# Altium PCB 3ER_PCB.PcbDoc (part 2 of 2)
Units mil, origin at the board's own origin, x right, y up, seen from the top; angles counter-clockwise.
Board outline 3500 x 3505 mil, 2 copper layers (Top Layer, Bottom Layer); 87 components, 62 nets, 335 pads, 137 vias.
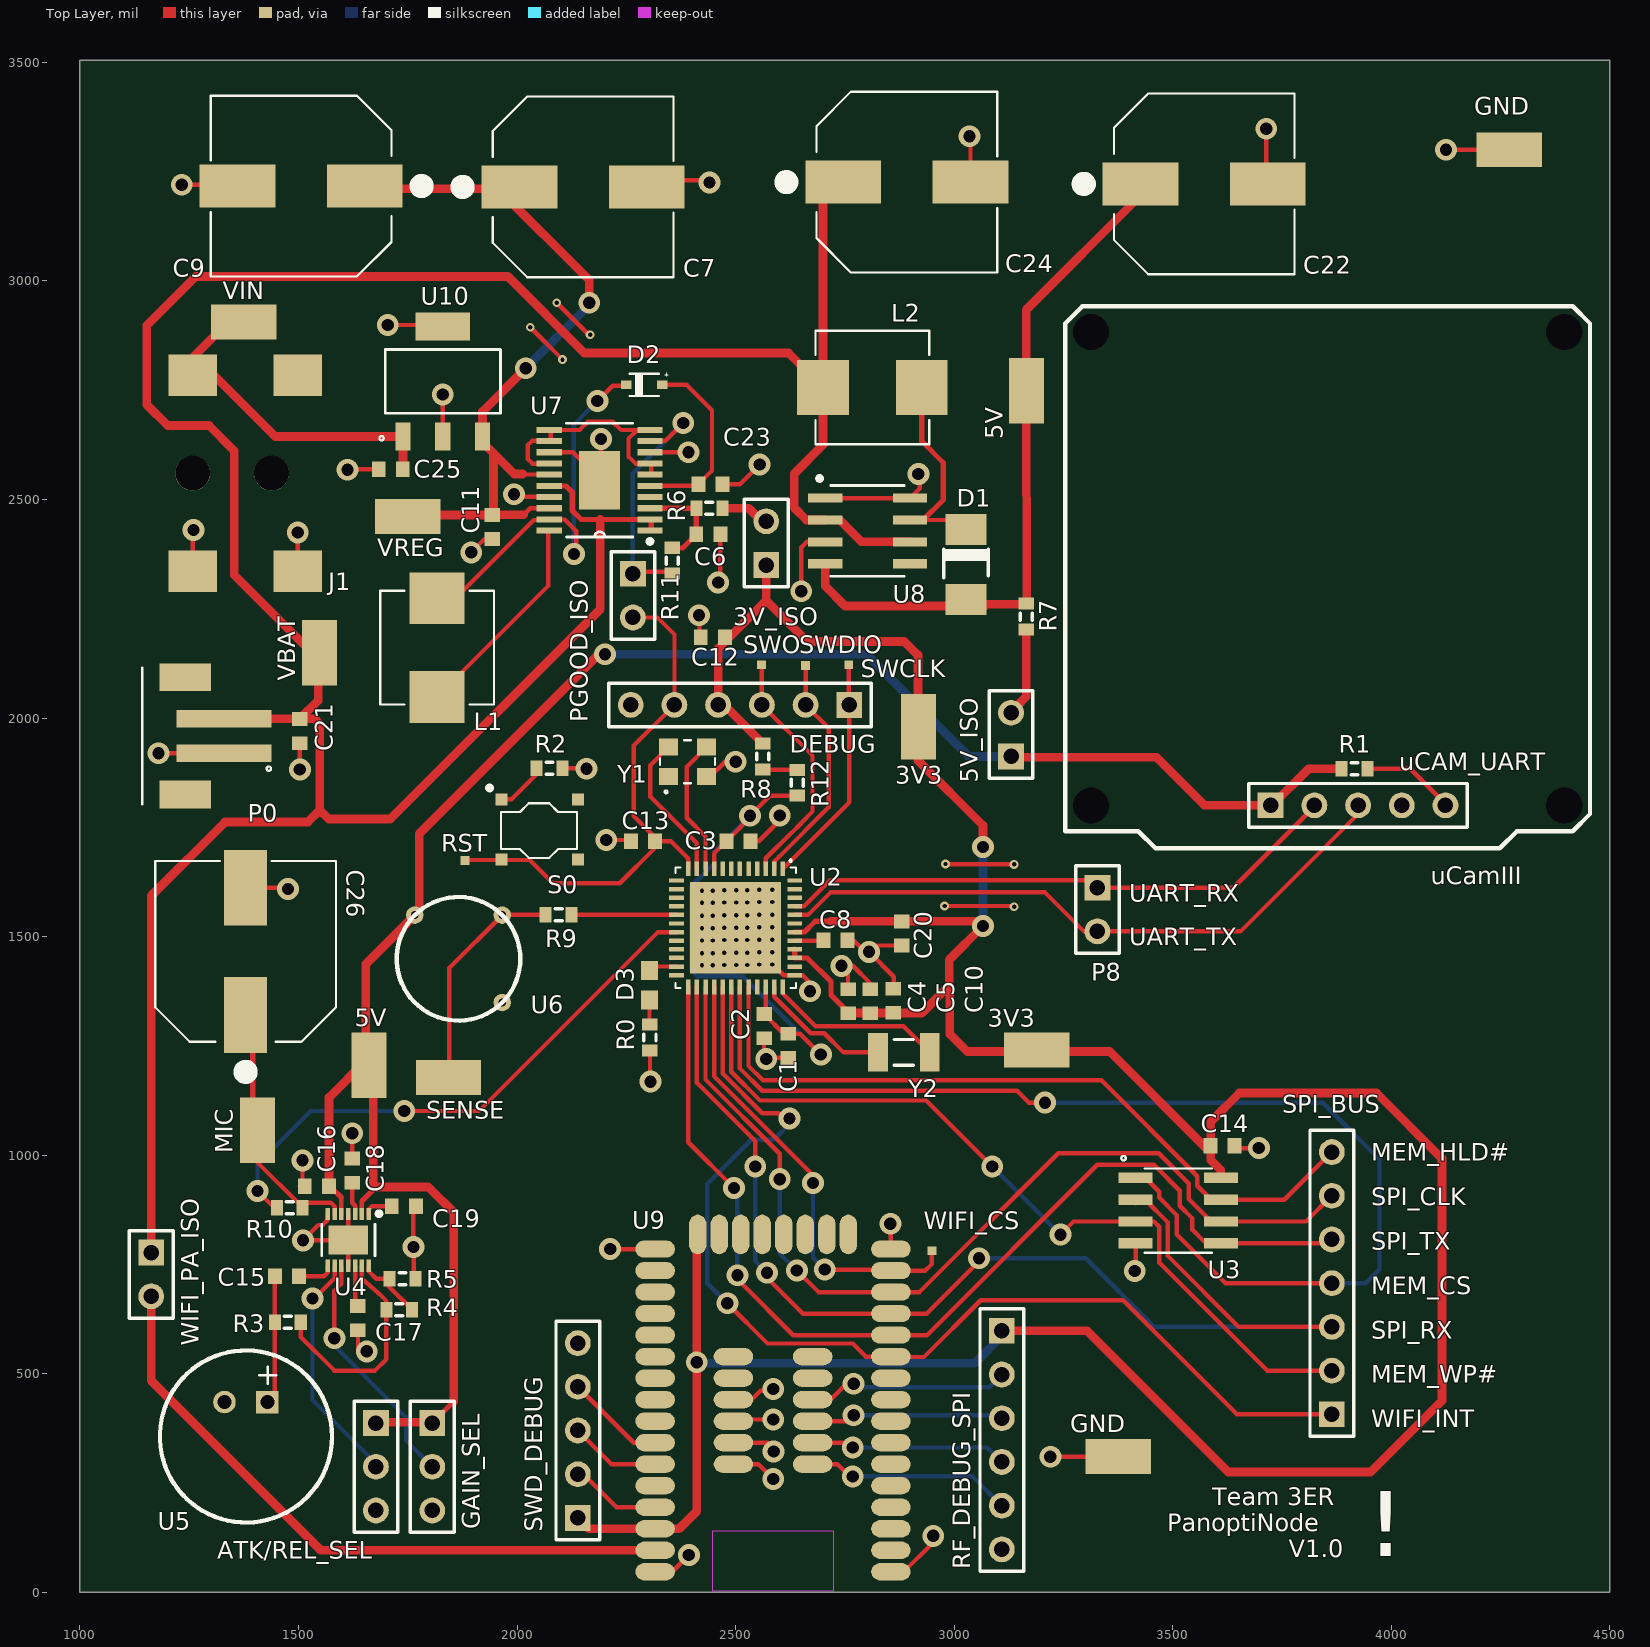
[diagram p0: Top Layer view]

## Silkscreen, mask and mechanical layers (free items; w line width, h text height) (continued)
Drill Drawing: (continued)
  text "NPTH" at 3320,4276 h60
  text "Round" at 3825.88,4276 h60
  text "Top Layer - Bottom Layer" at 4559.68,4276 h60
  text "Pad" at 6059.23,4276 h60
  text "Rounded" at 6649.08,4276 h60
  text "c203hn203" at 7394.88,4276 h60
  text "-" at 8044.7,4276 h60
  text "4" at 1630.48,4126 h60
  text "82.68mil (2.100mm)" at 2220.32,4126 h60
  text "NPTH" at 3320,4126 h60
  text "Round" at 3825.88,4126 h60
  text "Top Layer - Bottom Layer" at 4559.68,4126 h60
  text "Pad" at 6059.23,4126 h60
  text "Rounded" at 6649.08,4126 h60
  text "c152hn210" at 7394.88,4126 h60
  text "-" at 8044.7,4126 h60
  text "193 Total" at 1630.48,3976 h60

## Dimensions
1000,3505 to 4501,3094 on Drill Drawing
1000,3505 to 1000,0 on Drill Drawing